# Altium PCB GMU.PcbDoc (part 2 of 2)
Units mil, origin at the board's own origin, x right, y up, seen from the top; angles counter-clockwise.
Board outline 2287.2 x 1425 mil, 4 copper layers (Top Layer, GND, 3V3, Bottom Layer), stack 38.189 mil thick; 106 components, 59 nets, 301 pads, 340 vias.
Unrouted connection lines stored in the file: 21.
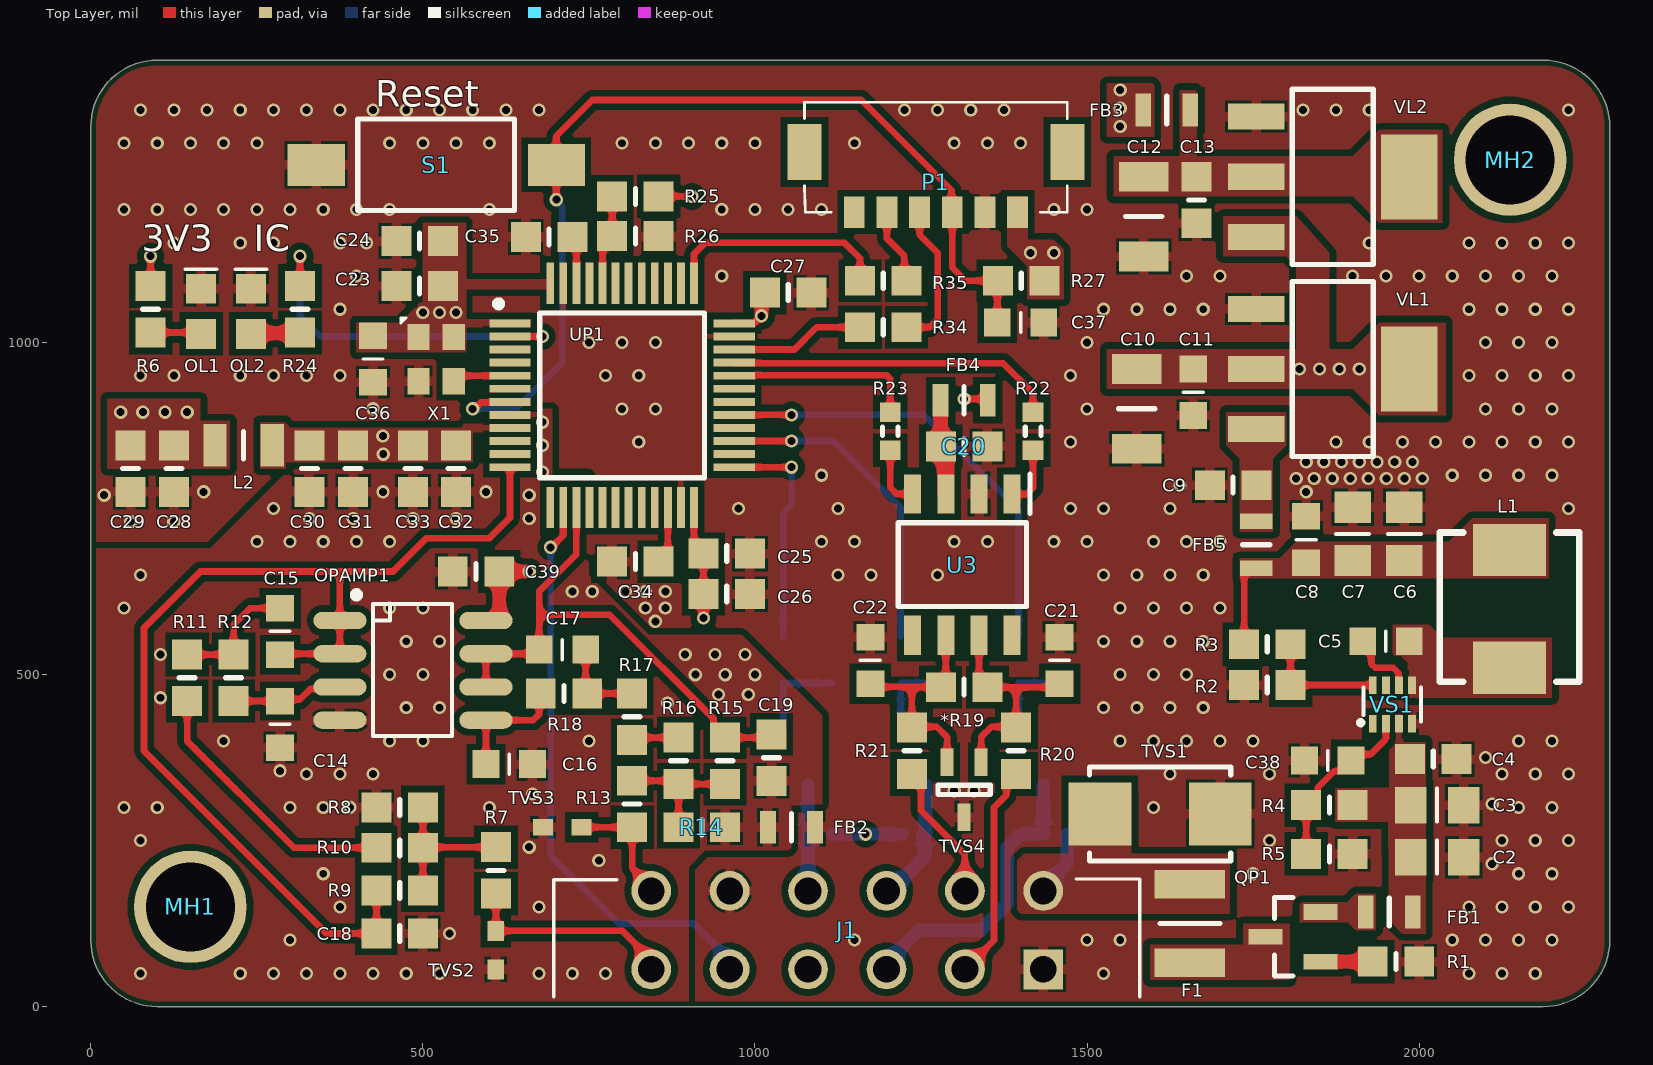
[diagram p0: Top Layer view]

## Polygon pours and split planes (outlines as drawn) (continued)
5V on 3V3 (split plane): 2032.45,897.55 1735,897.55 1734.02,897.36 1733.2,896.8 1123.2,286.8 1122.64,285.98 1122.45,285 1122.45,22.55 1032.55,22.55 1032.55,335 1032.55,337.7 1113.1,418.24 1113.65,419.07 1113.84,420.05 1113.84,420.24 1287.64,594.04 1287.64,594.02 1288.2,593.2 1289.02,592.64 1290,592.45 1290.98,592.64 1291.8,593.2 1292.36,594.02 1292.55,595 1292.55,598.94 1446.8,753.2 1741.06,1047.45 2032.45,1047.45
A3V3 on 3V3 (split plane): 563.2,788.2 688.2,663.2 696.4,655 678.94,637.55 606.06,637.55 397.55,846.06 397.55,873.94 401.06,877.45 473.94,877.45
12V_IN on 3V3 (split plane): 1453.2,278.2 1497.45,233.94 1497.45,200 1497.45,156.06 1473.94,132.55 1421.06,132.55 1341.8,211.8 1326.8,226.8 1316.8,236.8 1315.98,237.35 1315,237.55 1147.55,237.55 1147.55,268.94 1166.06,287.45 1443.94,287.45
GND on GND (split plane): 2195.05,1404.61 2202.81,1403.46 2210.43,1401.55 2217.82,1398.91 2224.91,1395.55 2231.65,1391.51 2237.95,1386.84 2243.77,1381.57 2249.04,1375.75 2253.72,1369.44 2257.76,1362.71 2261.11,1355.61 2263.76,1348.22 2265.66,1340.61 2266.82,1332.84 2267.17,1325.63 2267.11,1325 2267.11,100 2267.17,99.37 2266.82,92.16 2265.66,84.39 2263.76,76.78 2261.11,69.39 2257.76,62.29 2253.72,55.56 2249.04,49.25 2243.77,43.43 2237.95,38.16 2231.65,33.49 2224.91,29.45 2217.82,26.09 2210.43,23.45 2202.81,21.54 2195.05,20.39 2187.84,20.03 2187.2,20.1 863.2,20.1 893.8,50.7 894.36,51.52 894.55,52.5 894.55,206.44 915.56,227.45 1120,227.45 1120.98,227.65 1121.8,228.2 1122.36,229.02 1122.55,230 1122.55,279.5 1122.55,430 1122.36,430.98 1121.8,431.8 989.3,564.3 988.48,564.86 987.5,565.05 828.06,565.05 749.55,643.56 749.55,922.5 749.36,923.48 748.8,924.3 743.8,929.3 742.98,929.86 742,930.05 397,930.05 396.02,929.86 395.2,929.3 290.2,824.3 170.94,705.05 20.1,705.05 20.1,1325 20.03,1325.63 20.39,1332.84 21.54,1340.61 23.45,1348.22 26.09,1355.61 29.45,1362.71 33.49,1369.44 38.16,1375.75 43.43,1381.57 49.25,1386.84 55.56,1391.51 62.29,1395.55 69.39,1398.91 76.78,1401.55 84.39,1403.46 92.16,1404.61 99.37,1404.97 100,1404.9 2187.2,1404.9 2187.84,1404.97
AGND on GND (split plane): 744.45,921.44 744.45,642.5 744.64,641.52 745.2,640.7 825.2,560.7 826.02,560.14 827,559.95 986.44,559.95 1117.45,428.94 1117.45,279.5 1117.45,232.55 914.5,232.55 913.52,232.35 912.7,231.8 890.2,209.3 889.64,208.48 889.45,207.5 889.45,53.56 855.99,20.1 100,20.1 99.37,20.03 92.16,20.39 84.39,21.54 76.78,23.45 69.39,26.09 62.29,29.45 55.56,33.49 49.25,38.16 43.43,43.43 38.16,49.25 33.49,55.56 29.45,62.29 26.09,69.39 23.45,76.78 21.54,84.39 20.39,92.16 20.03,99.37 20.1,100 20.1,699.95 172,699.95 172.98,700.14 173.8,700.7 293.8,820.7 398.06,924.95 740.94,924.95

## Other copper
Top Layer:
  pour cut-out: 700,438.85 700,560 685,560 685,585 773.15,585 773.15,560 720,560 720,438.85
  pour cut-out: 2015,575 1885,575 1885,634.8 2015,634.8
  pour cut-out: 1761.41,578.04 1780,578.04 1780,513.03 1760.97,513.03
  pour cut-out: 2200,715 2200,645.41 2200.41,645 2195.41,640 2015,640 2015,582.65 2037.24,560.41 2200,560.41 2205.41,555 2205,554.59 2205,485 2245,485 2245,715
GND (plane layer: these items are gaps in the copper):
  pour cut-out: 2020,730 2020,465 2250,465 2250,730
  lines w5: -13,97.86 ccw(c82.36,97.86) 82.36,2.5 832,2.5 842,2.5 892,52.5 892,207.5 914.5,230 1120,230 1120,279.5 1120,430 987.5,562.5 827,562.5 747,642.5 747,922.5 742,927.5 667,927.5 397,927.5 292,822.5 172,702.5 -13,702.5 -13,102.5 -13,97.86
3V3 (plane layer: these items are gaps in the copper):
  pour cut-out: 2020,730 2245,730 2245,465 2020,465
  lines w5: 1280,925 1280,985 1280,1095 1020,1095 1020,605 1020,565 885,565 885,1010 715,1180 585,1180 585,1020 475,1020 475,1175 175,1175 175,810 25,810 25,1135 25,1265 1080,1265 1515,1265 1527.5,1277.5 1527.5,1342.5 1527.5,1405 1575,1405 1575,1345 1575,1205 1518.75,1148.75 1465,1095 1340,1095 1340,970 1340,890 ; 1290,595 1290,605 ; -5,95.36 ccw(c90.36,95.36) 90.36,0 840,0 850,0 900,50 900,205 940,245 1015,245 1015,305 1015,550 845,550 835,560 755,640 755,920 750,925 675,925 405,925 300,820 180,700 -5,700 -5,100 -5,95.36 ; 395,845 605,635 680,635 700,655 690,665 565,790 475,880 440,880 400,880 395,875 395,845 ; 1030,20 1030,335 1030,338.75 1111.29,420.05 1111.29,421.29 1445,755 1740,1050 2035,1050 2035,895 1735,895 1125,285 1125,20 1030,20 ; 1145,235 1310,235 1315,235 1325,225 1340,210 1420,130 1435,130 1475,130 1500,155 1500,200 1500,235 1455,280 1445,290 1165,290 1145,270 1145,235
  lines w6: 1280,925 1280,890 1330,890 1340,890

## Silkscreen, mask and mechanical layers (free items; w line width, h text height)
Top Overlay:
  text "Reset" at 428.36,1355 h40
  text "3V3" at 76.68,1137 h40
  text "IC" at 245.01,1137 h40
Bottom Overlay:
  region: 5 vertices and 7 holes, not listed, extent 1651.22,1026.36 2011.22,1225.42
  text "Gear Managment Unit RTH 1.0 Bartlomiej Smoter v1.0" at 2016.36,1261.67 h40
Board:
  the board outline again, w5